# Altium PCB Solder Training Tier 3.PcbDoc
Units mil, origin at the board's own origin, x right, y up, seen from the top; angles counter-clockwise.
Board outline 3000 x 2000 mil, 2 copper layers (Top Layer, Bottom Layer); 32 components, 17 nets, 137 pads, 4 vias.
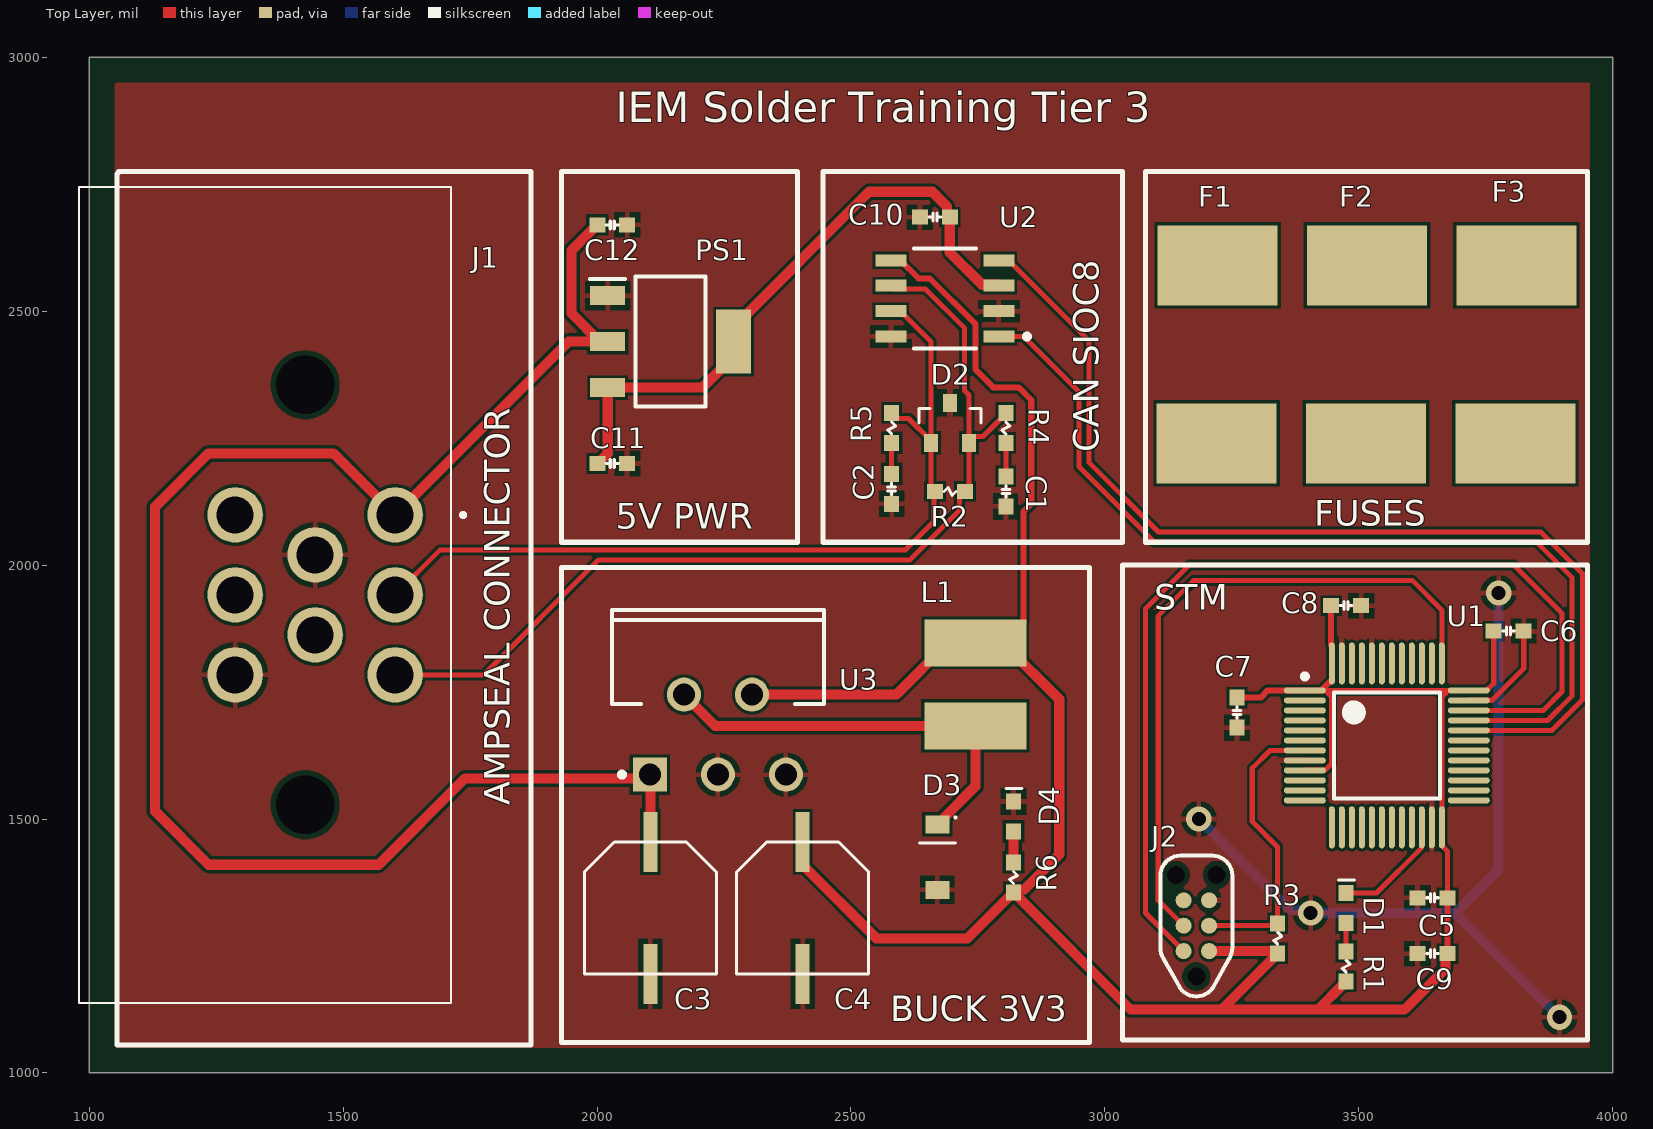
[diagram p0: Top Layer view]
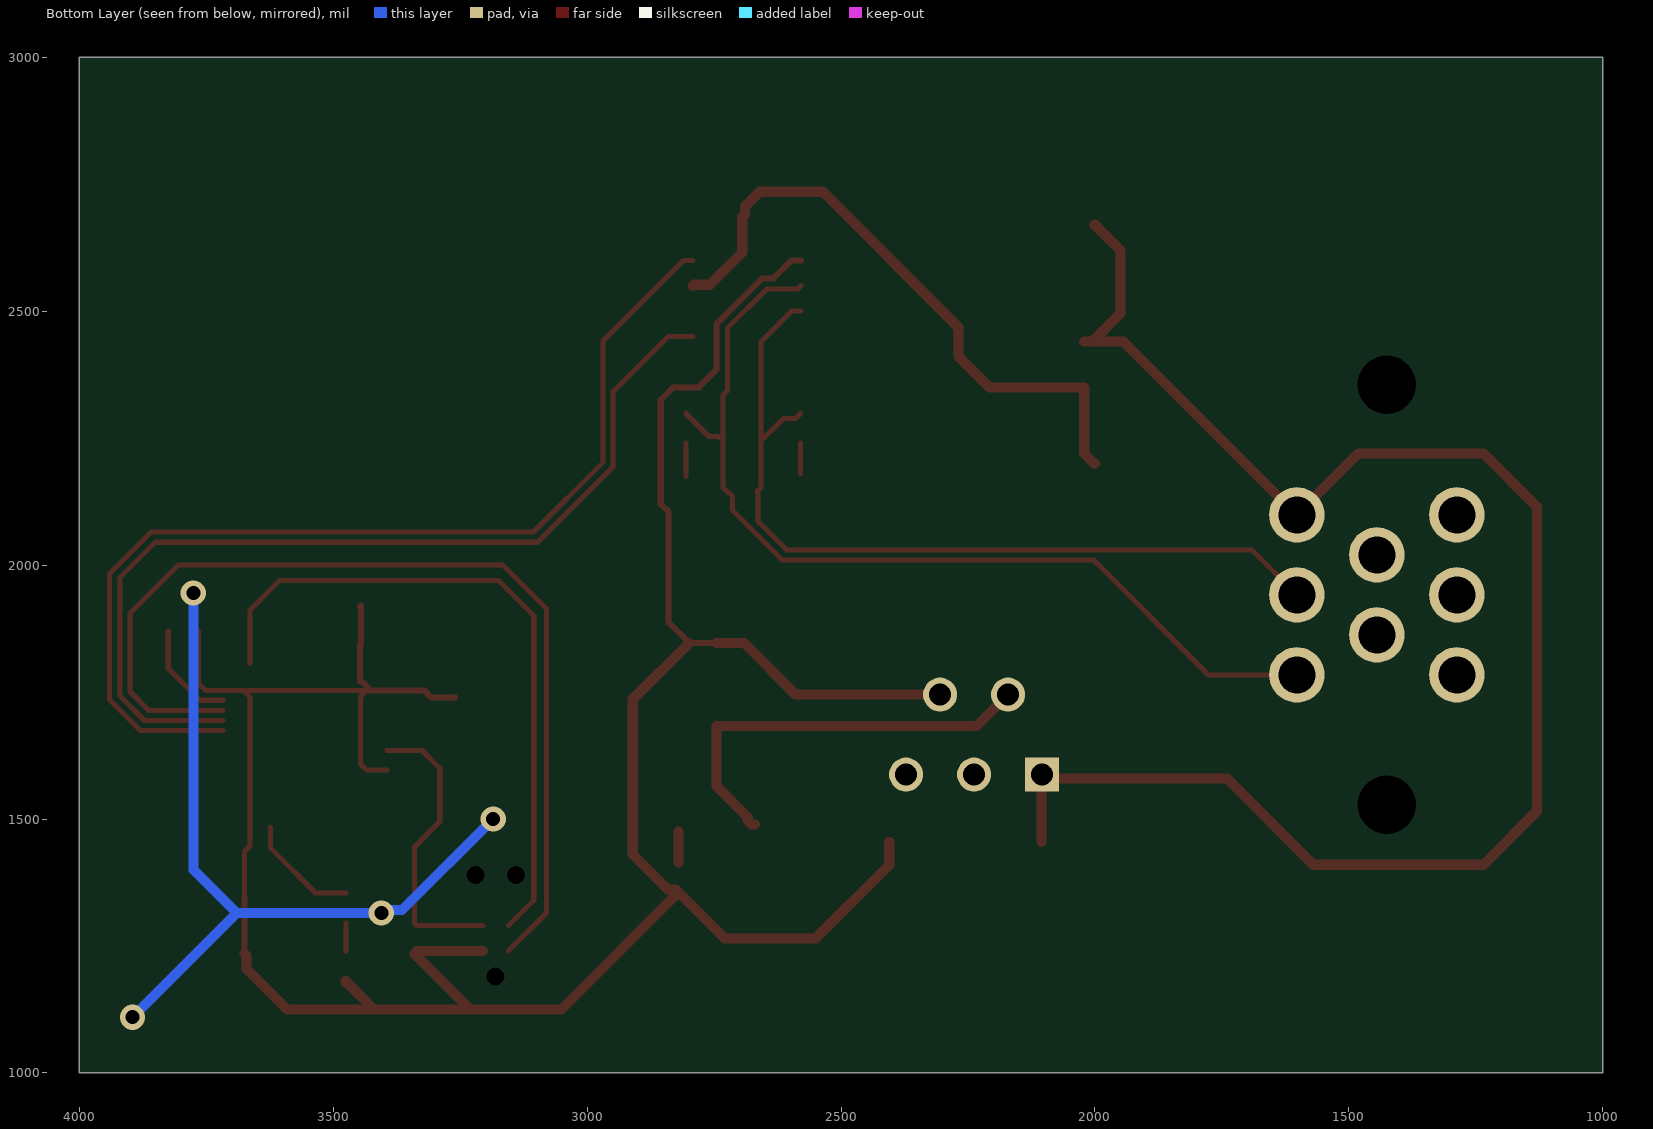
[diagram p1: Bottom Layer view, seen from below]
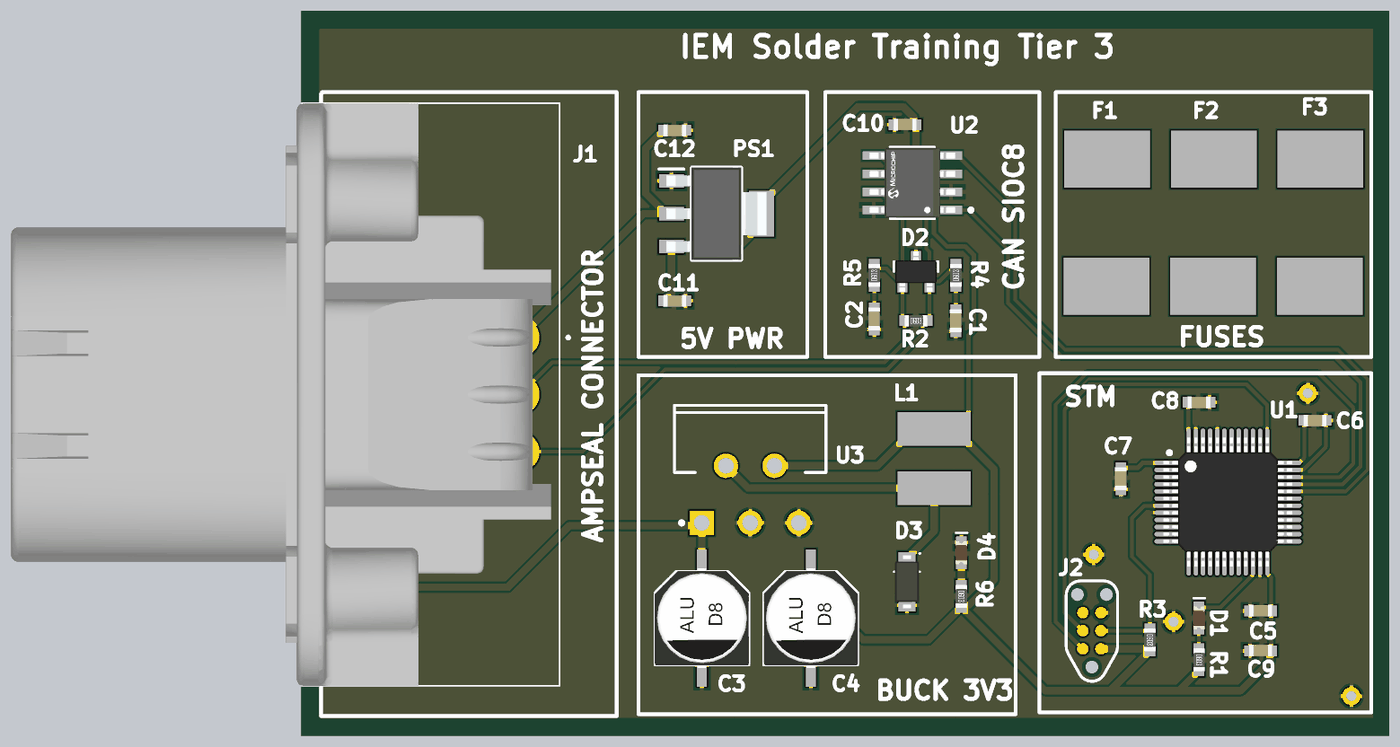
[diagram p2: 3D render of the assembled board from above, using the file's embedded part models]

## Layer stack, top to bottom
Top Solder: solder mask 0.4, Solder Resist, Dk 3.5
Top Layer: signal copper 1.4
Dielectric 1: dielectric 12.6, FR-4, Dk 4.8
Bottom Layer: signal copper 1.4
Bottom Solder: solder mask 0.4, Solder Resist, Dk 3.5

## Board outline
1000,1000 4000,1000 4000,3000 1000,3000

## Design rules (kind name [scope] priority, off if disabled: settings)
Clearance [All] p1: gap=6 ignorepadtopadclearanceinfootprint=FALSE except(10: Arc-Via Arc-Text Arc-Hole Track-Via Track-Text Track-Hole SMDPad-Via SMDPad-Text SMDPad-Hole THPad-Via THPad-Text THPad-Hole Via-Via Via-Text Via-Hole Fill-Text Fill-Hole Poly-Text Poly-Hole Region-Text Region-Hole Text-Text Text-Hole)
PolygonConnect [All] p1: connectstyle=Relief reliefconductorwidth=10 reliefentries=4 polygonreliefangle="90 Angle" airgapwidth=10
RoutingVias [All] p1: holewidth=28 width=50 viastyle="Through Hole" minholewidth=28 minwidth=50 maxholewidth=28 maxwidth=50
SolderMaskExpansion [All] p1: expansion=4 istentingtop=FALSE
Width [All] p1: maxlimit=20 minlimit=10 preferedwidth=10 minimp=50.000000 maximp=50.000000 favimp=50.000000
30 further rules are at their usual default settings.

## Components (designator, comment, footprint, x,y, rotation, side; value= is the part's Value field where it differs from the comment)
C1 "560p" CAP-0603 2805,2145 r90 top
C2 "560p" CAP-0603 2580,2150 r90 top
C3 "220uF" CAP-6.3D7.7H-SMD 2105,1325 r270 top
C4 "220uF" CAP-6.3D7.7H-SMD 2405,1325 r270 top
C5 "1uF" CAP-0603 3645,1345 r0 top
C6 "1uF" CAP-0603 3795,1870 r180 top
C7 "1uF" CAP-0603 3260,1709.53 r90 top
C8 "1uF" CAP-0603 3475,1920 r180 top
C9 "1uF" CAP-0603 3645,1235 r0 top
C10 "1uF" CAP-0603 2665,2685 r0 top
C11 "2.2uF" CAP-0603 2030,2200 r180 top
C12 "4.7uF" CAP-0603 2030,2670 r180 top
D1 "LEDRED-0603" LEDRED-0603 3475,1325 r90 top
D2 "DIODE-SOT23_PESD1CAN" SOT23 2695,2280 r0 top
D3 "" SOD123 2670,1425 r270 top
D4 "LEDRED-0603" LEDRED-0603 2820,1505 r90 top
F1 "FUSE_885" FUSE_885 3220,2415 r90 top
F2 "FUSE_885" FUSE_885 3515.98,2415 r270 top
F3 "FUSE_885" FUSE_885 3810,2415 r270 top
J1 "1-776279-1" 17762791 1602.48,2098.74 r270 top
J2 "TC2030-MCP-NL" TC2030-MCP-NL 3180,1290 r90 top
L1 "33u" IND-6045 2745,1765 r90 top
PS1 "SPX1117M3-L-5-0_TR" SOT230P700X170-4N 2145,2440 r0 top
R1 "200" RES-0603 3475,1210 r270 top
R2 "120" RES-0603 2695,2145 r0 top
R3 "10k" RES-0603 3340,1265 r270 top
R4 "100" RES-0603 2805,2270 r90 top
R5 "100" RES-0603 2580,2270 r90 top
R6 "200" RES-0603 2820,1385 r270 top
U1 "IC-LQFP48_STM32F103C8T6" STM-LQFP48_M 3555,1645 r0 top
U2 "MCP2562FDT-E/SN" FP-C04-057-SN-MFG 2685,2525 r180 top
U3 "LM2592HVT-3.3" T05D 2238.07,1666.26 r0 top

## Footprints (in the part's own frame and the unit in brackets; to place one, negate y for a bottom-side part, rotate by r counter-clockwise, add the part's x,y. Pads: shape width x height; smd on the part's side, far side on the other; paste and mask are expansions set on the pad)
17762791 [mm]
  round 2.775 hole 1.85: 1(0,0) 2(4,0) 3(8,0) 4(2,-4) 5(6,-4) 6(0,-8) 7(4,-8) 8(8,-8)
  round 1.465 hole 2.93 unplated: MH1(-6.5,-4.5) MH2(14.5,-4.5)
  silkscreen extent -16.4,-15.8 24.4,3.5, body extent -16.4,-35.6 24.4,2.2, height 27.85
CAP-6.3D7.7H-SMD [mm]
  rect 3x0.7 smd: NEG(3.3,0) POS(-3.3,0)
  silkscreen extent -3.3,-3.3 3.3,3.3, body extent -3.5,-3.3 3.5,3.3, height 7.7
CAP-0603 [mm]
  rect 0.8x0.75 smd: 1(-0.75,0) 2(0.75,0)
  silkscreen extent -0.3,-0.2 0.3,0.2, body extent -0.8,-0.4 0.8,0.42, height 0.81
FP-C04-057-SN-MFG [mm]
  rect 1.55x0.6 smd paste+0 mask+0: 1(-2.7,1.905) 2(-2.7,0.635) 3(-2.7,-0.635) 4(-2.7,-1.905) 5(2.7,-1.905) 6(2.7,-0.635) 7(2.7,0.635) 8(2.7,1.905)
  silkscreen extent -4.23,-2.5 1.55,2.5, body extent -3.57,-2.75 3.57,2.75, height 0.25
FUSE_885 [mm]
  rect 4x6 smd: 1(-4.45,0) 2(4.45,-0.05)
  body extent -5.42,-2.4 5.45,2.4, height 4.78
IND-6045 [mm]
  rect 2.35x5.1 smd: 1(-2.075,0) 2(2.075,0)
  body extent -3.15,-3 3.15,3, height 4.5
LEDRED-0603 [mm]
  rect 0.8x0.75 smd: A(-0.75,0) K(0.75,0)
  silkscreen extent 1.4,-0.42 1.4,0.38, body extent -0.8,-0.4 0.8,0.4, height 0.53
RES-0603 [mm]
  rect 0.8x0.75 smd: 1(-0.75,0) 2(0.75,0)
  silkscreen extent -0.3,-0.2 0.3,0.2, body extent -0.8,-0.4 0.8,0.4, height 0.44
SOD123 [mm] "SODFL, 2-Leads, Body 1.55x3.70mm, IPC Medium Density"
  rect 0.9x1.2 smd: A(1.635,0) K(-1.635,0)
  silkscreen extent -2.03,-0.9 -0.7,0.95, body extent -1.85,-0.85 1.85,0.85, height 1.3
SOT23 [mm]
  rect 0.7x0.9 smd: 1(-0.95,-1) 2(0.95,-1) 3(0,1)
  silkscreen extent -1.55,0 1.55,0.72, body extent -1.45,-1.41 1.45,1.41, height 1.5
SOT230P700X170-4N [mm]
  rect 1.75x0.95 smd: 1(-3.15,2.3) 2(-3.15,0) 3(-3.15,-2.3)
  rect 1.75x3.2 smd: 4(3.15,0)
  silkscreen extent -4.02,-3.25 1.75,3.25, body extent -3.5,-3.25 3.5,3.25, height 1.7
STM-LQFP48_M [mm] "QFP, 48-Leads, Body 7x7mm, Pitch 0.5mm, IPC Low Density"
  oval 2.1x0.3 smd: 1(-4.1,2.75) 2(-4.1,2.25) 3(-4.1,1.75) 4(-4.1,1.25) 5(-4.1,0.75) 6(-4.1,0.25) 7(-4.1,-0.25) 8(-4.1,-0.75) 9(-4.1,-1.25) 10(-4.1,-1.75) 11(-4.1,-2.25) 12(-4.1,-2.75) 25(4.1,-2.75) 26(4.1,-2.25) 27(4.1,-1.75) 28(4.1,-1.25) 29(4.1,-0.75) 30(4.1,-0.25) 31(4.1,0.25) 32(4.1,0.75) 33(4.1,1.25) 34(4.1,1.75) 35(4.1,2.25) 36(4.1,2.75)
  oval 0.3x2.1 smd: 13(-2.75,-4.1) 14(-2.25,-4.1) 15(-1.75,-4.1) 16(-1.25,-4.1) 17(-0.75,-4.1) 18(-0.25,-4.1) 19(0.25,-4.1) 20(0.75,-4.1) 21(1.25,-4.1) 22(1.75,-4.1) 23(2.25,-4.1) 24(2.75,-4.1) 37(2.75,4.1) 38(2.25,4.1) 39(1.75,4.1) 40(1.25,4.1) 41(0.75,4.1) 42(0.25,4.1) 43(-0.25,4.1) 44(-0.75,4.1) 45(-1.25,4.1) 46(-1.75,4.1) 47(-2.25,4.1) 48(-2.75,4.1)
  silkscreen extent -4.22,-2.65 2.65,3.57, body extent -4.51,-4.51 4.51,4.51, height 1.55
T05D [mm] "TO, Thru-Hole, Vertical, Heatsink Mounted; 5 Bent Staggered Leads; Pitch 1.7 mm"
  rect 1.7x1.7 hole 1.1: 1(-3.4,-2)
  round 1.7 hole 1.1: 2(-1.7,2) 3(0,-2) 4(1.7,2) 5(3.4,-2)
  silkscreen extent -5.3,-2.12 5.3,6.23, body extent -5.35,-2.31 5.35,6.28, height 21.1
TC2030-MCP-NL [mm] "Conector ICD en placa"
  round 0.8 smd paste-0.4: 1(-1.27,-0.635) 2(-1.27,0.635) 3(0,-0.635) 4(0,0.635) 5(1.27,-0.635) 6(1.27,0.635)
  round 0.85 hole 0.9 unplated mask+0: ""(-2.54,0) ""(2.54,-1.016) ""(2.54,1.016)
  silkscreen extent -3.54,-1.8 3.5,1.8, body extent -3.54,-1.8 3.5,1.8

## Part data
C1 C2 C5 C6 C7 C8 C9 C10 C11 C12: library part CMP-009-000303-1, Design Item ID=CAP-0603, Source=ife19_Elec_Library.SchLib
C3 C4: library part CMP-003-000764-1, Design Item ID=CAP-6.3D7.7H-SMD, Source=ife19_Elec_Library.SchLib
D1 D4: library part CMP-009-000189-1, Design Item ID=LEDRED-0603, Source=ife19_Elec_Library.SchLib
D2: library part CMP-006-000028-1, Design Item ID=DIODE-SOT23_PESD1CAN, Source=ife19_Elec_Library.SchLib
D3: library part CMP-010-000008-1, Design Item ID=DIODE-SOD123, Source=ife19_Elec_Library.SchLib
F1 F2 F3: library part CMP-011-000003-1, Design Item ID=FUSE_885, Source=ife19_Elec_Library.SchLib
J1: library part CMP-038-000007-1, "Connector", Manufacturer_Name="TE Connectivity", Mouser Part Number=571-1-776279-1, Arrow Part Number=1-776279-1, Arrow Price/Stock=https://www.arrow.com/en/products/1-776279-1/te-connectivity, Datasheet Link=https://www.te.com/commerce/DocumentDelivery/DDEController?Action=showdoc&DocId=Customer+Drawing%7F776279%7FF7%7Fpdf%7FEnglish%7FENG_CD_776279_F7.pdf%7F1-776279-1, Design Item ID=1-776279-1, Height=32.1mm, Manufacturer_Part_Number=1-776279-1, Mouser Price/Stock=https://www.mouser.co.uk/ProductDetail/TE-Connectivity/1-776279-1?qs=tLAa1RwIH6fAW8GUe6Xfuw%3D%3D, Source=SamacSys.SchLib
J2: library part CMP-003-000769-1, "Conector par ICD", Design Item ID=TC2030-MCP-NL, Source="Image Pasted at 2021-10-31 17-08.SchLib"
L1: library part CMP-011-000044-1, Design Item ID=IND-6045, Source=ife19_Elec_Library.SchLib
PS1: library part CMP-042-000000-1, "Power Supply", Arrow Part Number=SPX1117M3-L-5-0/TR, Manufacturer_Name=EXAR, Mouser Part Number=701-SPX1117M3-L-50TR, Arrow Price/Stock=https://www.arrow.com/en/products/spx1117m3-l-5-0tr/exar, Datasheet Link=https://datasheet.datasheetarchive.com/originals/distributors/Datasheets-DGA25/1769206.pdf, Design Item ID=SPX1117M3-L-5-0_TR, Height=1.7mm, Manufacturer_Part_Number=SPX1117M3-L-5-0/TR, Mouser Price/Stock=https://www.mouser.com/Search/Refine.aspx?Keyword=701-SPX1117M3-L-50TR, Source=SamacSys.SchLib
R1 R2 R4 R5 R6: library part CMP-014-000032-1, Design Item ID=RES-0603, Source=ife19_Elec_Library.SchLib
R3: library part CMP-008-000144-1, Design Item ID=RES-0603, Source=ife19_Elec_Library.schlib
U1: library part CMP-009-000216-1, I/Os (High Current)=37, Operating Frequency(F) (Processor speed) (MHz)=72, PartNumber=STM32F103C8T6, Supply Voltage(Vcc) min (V)=2, A/D Converter="2x12-bit (10 Channel)", ComponentLink1Description="Manufacturer URL", ComponentLink1URL=http://www.st.com/web/en/home.html, ComponentLink2Description=Datasheet, ComponentLink2URL=http://www.st.com/st-web-ui/static/active/en/resource/technical/document/datasheet/CD00161566.pdf, ComponentLink3Description="Package Specification", ComponentLink3URL=http://www.st.com/st-web-ui/static/active/en/resource/technical/document/datasheet/DM00058181.pdf, Core="ARM Cortex-M3", DatasheetVersion="Rev. 16", Design Item ID=IC-LQFP48_STM32F103C8T6, FLASH Size (Prog) (kB)=64, Internal RAM Size (kB)=20, Mounting Technology="Surface Mount", PackageDescription="48-Pin Low Profile Quad Flat Package, 7 x 7 mm Body, 0.5 mm Pitch", PackageReference=LQFP48, PackageVersion="Rev. 6, 06/2013", Packing=Tray, Source=ife19_Elec_Library.SchLib
U2: library part CMP-06279-000005-1, "IC TRANSCEIVER 1/1 8SOIC", Case/Package=SOIC, Max Operating Temperature=125°C, Max Supply Voltage=5.5V, Min Operating Temperature=-40°C, Min Supply Voltage=4.5V, Operating Supply Current=70mA, Package Quantity=3300, Data Rate=8Mbps, Mount="Surface Mount", Number of Pins=8, Number of Transceivers=1, Packaging="Tape and Reel", Receiver Hysteresis=200mV, Weight=0.019048oz
U3: library part CMP-0069-01883-2, "SIMPLE SWITCHER® Power Converter 150 KHz 2A Step-Down Voltage Regulator, 5-pin TO-220", Manufacturer="National Semiconductor", PackageTopMarking="NSUZXYTTE#*LM2592HVT*-3.3 P+", PowerWise=N, ComponentLink1Description="LM2592HV Datasheet", ComponentLink1URL=http://www.national.com/ds/LM/LM2592HV.pdf, ComponentLink2Description="LM2592HV Web Page", ComponentLink2URL=http://www.national.com/pf/LM/LM2592HV.html, ComponentLink3Description="T05D Package Page", ComponentLink3URL=http://www.national.com/packaging/folders/t05d.html, CompType=Switcher, DatasheetVersion=Aug-2001, PackageDescription="TO-220, Molded, Stagger Bend, 5 Lead", PackageReference=T05D, PackageVersion="revA, Oct-1989", PinCount=5, RevisionNote="Component URLs added", RoHS=N

## Via types
v1: diameter 50, hole 28, Top Layer to Bottom Layer, 4 vias

## Nets (pads, with @x,y where several pads share a name; then routed paths per layer and width w, separated by ;. In a path a pad name is that pad's centre, name@x,y a point inside that pad or via, vN(x,y) a via of type N, cw(c..) or ccw(c..) an arc to the next point about the centre after c; other vN are vias at no path point)
+3V3: C4.POS C5.2 C6.2 C7.2 C8.2 C9.2 J2.1 L1.2 R1.2 R3.2 R6.2 U1.1 U1.9 U1.24 U1.36 U1.48 U2.5 U3.4 | length 5527.1
  Top Layer w10: U1.9 3393.93,1596.13 3433.59,1596.13 3445.92,1608.47 3445.92,1740.59 U1.1@3433.59,1752.92 ; U1.1@3433.59,1753.27 U1.36 3751.36,1753.27 3765.47,1767.38 C6.2 ; C5.2 3674.53,1436.4 3663.27,1447.66 U1.24 3663.27,1739.77 U1.36@3676.41,1752.92
  Top Layer w12: U2.5 2597.4,2600 2633.21,2564.19 2655.51,2564.19 2744.79,2474.91 2744.79,2385.21 2780,2350 2830,2350 2855,2325 2855,2120.26 2839.39,2104.66 2839.39,1886.95 2799.13,1846.69 L1.2 ; C7.2@3260,1740.04 C7.2 3306.45,1739.06 3320.66,1753.27 U1.1 3428.83,1753.27 3428.92,1753.36 3428.92,1756.2 3443.8,1771.08 3446.64,1771.08 3446.73,1771.17 U1.48 3446.73,1841.66 3445.47,1842.92 C8.2 C8.2@3446.64,1918.83 ; C9.2 C5.2
  Top Layer w20: U3.4 2589.17,1745 2690.87,1846.69 L1.2 ; C4.POS 2405,1409.65 2549.65,1265 2729.53,1265 2814.25,1349.72 2815.24,1349.72 R6.2@2820,1354.49 ; L1.2@2799.13,1846.69 2910,1735.83 2910,1430 2841.22,1361.22 2824.76,1361.22 2820,1356.46 R6.2 R6.2@2820,1354.49 ; J2.1 R3.2@3335.24,1240 ; 3230.51,1125 3419.53,1125 ; R3.2 3340,1234.49 3335.24,1229.72 3334.72,1229.72 3230,1125 3050.47,1125 2825.75,1349.72 2824.76,1349.72 R6.2@2820,1354.49 ; R1.2 3475,1179.49 3470.24,1174.72 3469.25,1174.72 3419.53,1125 ; C9.2 3670.79,1231.27 3670.79,1205.79 3590,1125 3419.53,1125
+5: C10.2 C11.2 PS1.3 PS1.4 U2.3 | length 1249
  Top Layer w20: C11.2 2001.46,2200 2020.98,2219.53 PS1.3 2207.01,2349.45 2269.02,2411.46 PS1.4 2269.02,2468.54 2535.47,2735 2660,2735 2688.78,2706.22 2688.78,2689.76 2693.54,2685 C10.2 2694.53,2615.47 2758.19,2551.81 2789.49,2551.81 U2.3
+12: C3.POS C12.2 J1.1 PS1.2 U3.1 | length 3224.6
  Top Layer w20: C12.2 1999.49,2670 1994.72,2665.24 1994.72,2664.25 1950,2619.53 1950,2495.24 PS1.2@2005.24,2440 ; PS1.2 PS1.2@2005.24,2440 ; C3.POS 2105,1586.73 U3.1 2096.69,1580 1740,1580 1570,1410 1235,1410 1130,1515 1130,2115 1235,2220 1481.22,2220 J1.1 1943.74,2440 PS1.2@2005.24,2440
GND: C1.1 C2.1 C3.NEG C4.NEG C5.1 C6.1 C7.1 C8.1 C9.1 C10.1 C11.1 C12.1 D2.3 D3.A D4.K J1.4 J1.8 J2.5 PS1.1 U1.8 U1.23 U1.35 U1.44 U1.47 U2.2 U2.8 U3.3 U3.5 | length 1744.5
  Top Layer w10: U1.35 3716.73,1733.9 3762.05,1733.9 3824.53,1796.38 C6.1
  Bottom Layer w20: v1(3185,1500) 3364.26,1320.74 3399.26,1320.74 v1(3405,1315) 3690,1315 ; v1(3775,1945) 3775,1400 3690,1315 ; v1(3895,1110) 3690,1315
NetC1_2: C1.2 R4.1 | length 65.9
  Top Layer w10: C1.2 R4.1
NetC2_2: C2.2 R5.1 | length 60.9
  Top Layer w10: C2.2 R5.1
NetD1_A: D1.A R1.1 | length 55.9
  Top Layer w10: R1.1 D1.A
NetD1_K: D1.K U1.22 | length 225.6
  Top Layer w10: D1.K 3534.5,1354.53 3623.55,1443.58 3623.55,1483.24 U1.22
NetD2_1: D2.1 J1.2 R2.1 R5.2 U2.7 | length 1683.6
  Top Layer w10: J1.2 1691.22,2030 2607.37,2030 2663.69,2086.31 2663.69,2143.21 R2.1 2657.6,2152.87 D2.1 D2.1@2657.6,2244.57 ; U2.7 2597.4,2500 2657.6,2439.8 D2.1@2657.6,2244.57 ; R5.2 2580,2298.54 2589.76,2288.78 2613.39,2288.78 D2.1@2657.6,2244.57
NetD2_2: D2.2 J1.3 R2.2 R4.2 U2.6 | length 1891.3
  Top Layer w10: J1.3 1776.41,1783.78 2002.63,2010 2615.66,2010 2713.78,2108.12 2713.78,2135.24 2720.11,2141.57 2721.09,2141.57 2732.4,2152.87 D2.2@2732.4,2244.57 ; U2.6 2585.51,2543.19 2646.81,2543.19 2723.79,2466.21 2723.79,2343.29 2732.4,2334.68 D2.2@2732.4,2244.57 ; R4.2 2805,2298.54 2759.8,2253.35 2741.18,2253.35 D2.2@2732.4,2244.57
NetD3_K: D3.K L1.1 U3.2 | length 827.9
  Top Layer w20: U3.2 2232.83,1683.31 L1.1 2745,1564.37 2683.62,1502.99 2683.62,1497.09 2675.91,1489.37 D3.K
NetD4_A: D4.A R6.1 | length 60.9
  Top Layer w20: R6.1 D4.A
NetJ2_2: J2.2 U1.34 | length 1952.9
  Top Layer w10: J2.2 3080,1315 3080,1914 3166,2000 3805,2000 3900,1905 3900,1750.91 3863.3,1714.21 ; U1.34 3863.3,1713.9
NetJ2_3: J2.3 R3.1 U1.7 | length 581.2
  Top Layer w10: J2.3 3335.47,1290 R3.1 3340,1445 3290,1495 3290,1600 3324.81,1634.81 3393.24,1634.81 U1.7
NetJ2_4: J2.4 U1.37 | length 1347.4
  Top Layer w10: J2.4 3105,1340 3105,1900 3175,1970 3605,1970 3663.27,1911.73 U1.37
NetU1_32: U1.32 U2.4 | length 2041.8
  Top Layer w10: U2.4 2810,2600 2969,2441 2969,2201.66 3105.66,2065 3858.28,2065 3940,1983.28 3940,1734.34 3879.87,1674.21 3874.53,1674.21 ; U1.32 3874.53,1674.53
NetU1_33: U1.33 U2.1 | length 1867.9
  Top Layer w10: U2.1 2840,2450 2949,2341 2949,2193.37 3097.37,2045 3850,2045 3920,1975 3920,1742.63 3871.59,1694.21 U1.33
pads on no net: F1.1 F1.2 F2.1 F2.2 F3.1 F3.2 J1.5 J1.6 J1.7 J1.MH1 J1.MH2 J2. J2.6 U1.2 U1.3 U1.4 U1.5 U1.6 U1.10 U1.11 U1.12 U1.13 U1.14 U1.15 U1.16 U1.17 U1.18 U1.19 U1.20 U1.21 U1.25 U1.26 U1.27 U1.28 U1.29 U1.30 U1.31 U1.38 U1.39 U1.40 U1.41 U1.42 U1.43 U1.45 U1.46

## Polygon pours and split planes (outlines as drawn)
GND on Top Layer "GND_L01_P000" (solid, pour order 0): 1050,2950 3955,2950 3955,1050 1055,1050

## Silkscreen, mask and mechanical layers (free items; w line width, h text height)
Top Overlay:
  lines w10: 1057.5,2775 1870,2775 1870,1055 1055,1055 1055,2770 1060,2775 ; 1930,1060 2970,1060 2970,1995 1930,1995 1930,1060 ; 1930,2045 2395,2045 2395,2775 1930,2775 1930,2045 ; 2445,2045 2445,2775 3035,2775 3035,2045 2445,2045 ; 3035,1065 3950,1065 3950,2000 3035,2000 3035,1065 ; 3080,2045 3080,2775 3950,2775 3950,2045 3080,2045
  text "IEM Solder Training Tier 3" at 2037,2872 h60
  text "CAN SIOC8" at 2988,2222 h50 r90
  text "FUSES" at 3412,2077 h50
  text "5V PWR" at 2037,2072 h50
  text "STM" at 3097,1912 h50
  text "AMPSEAL CONNECTOR" at 1828,1527 h50 r90
  text "BUCK 3V3" at 2577,1102 h50
Bottom Solder:
  drawing of 3 lines, arcs and shapes, not listed